# Altium PCB Clock_Board.PcbDoc
Units mm, origin at the board's own origin, x right, y up, seen from the top; angles counter-clockwise.
Board outline 370.84 x 228.47 mm, 4 copper layers (Top Layer, Internal Plane 1, Internal Plane 2, Bottom Layer); 58 components, 69 nets, 262 pads, 0 vias.
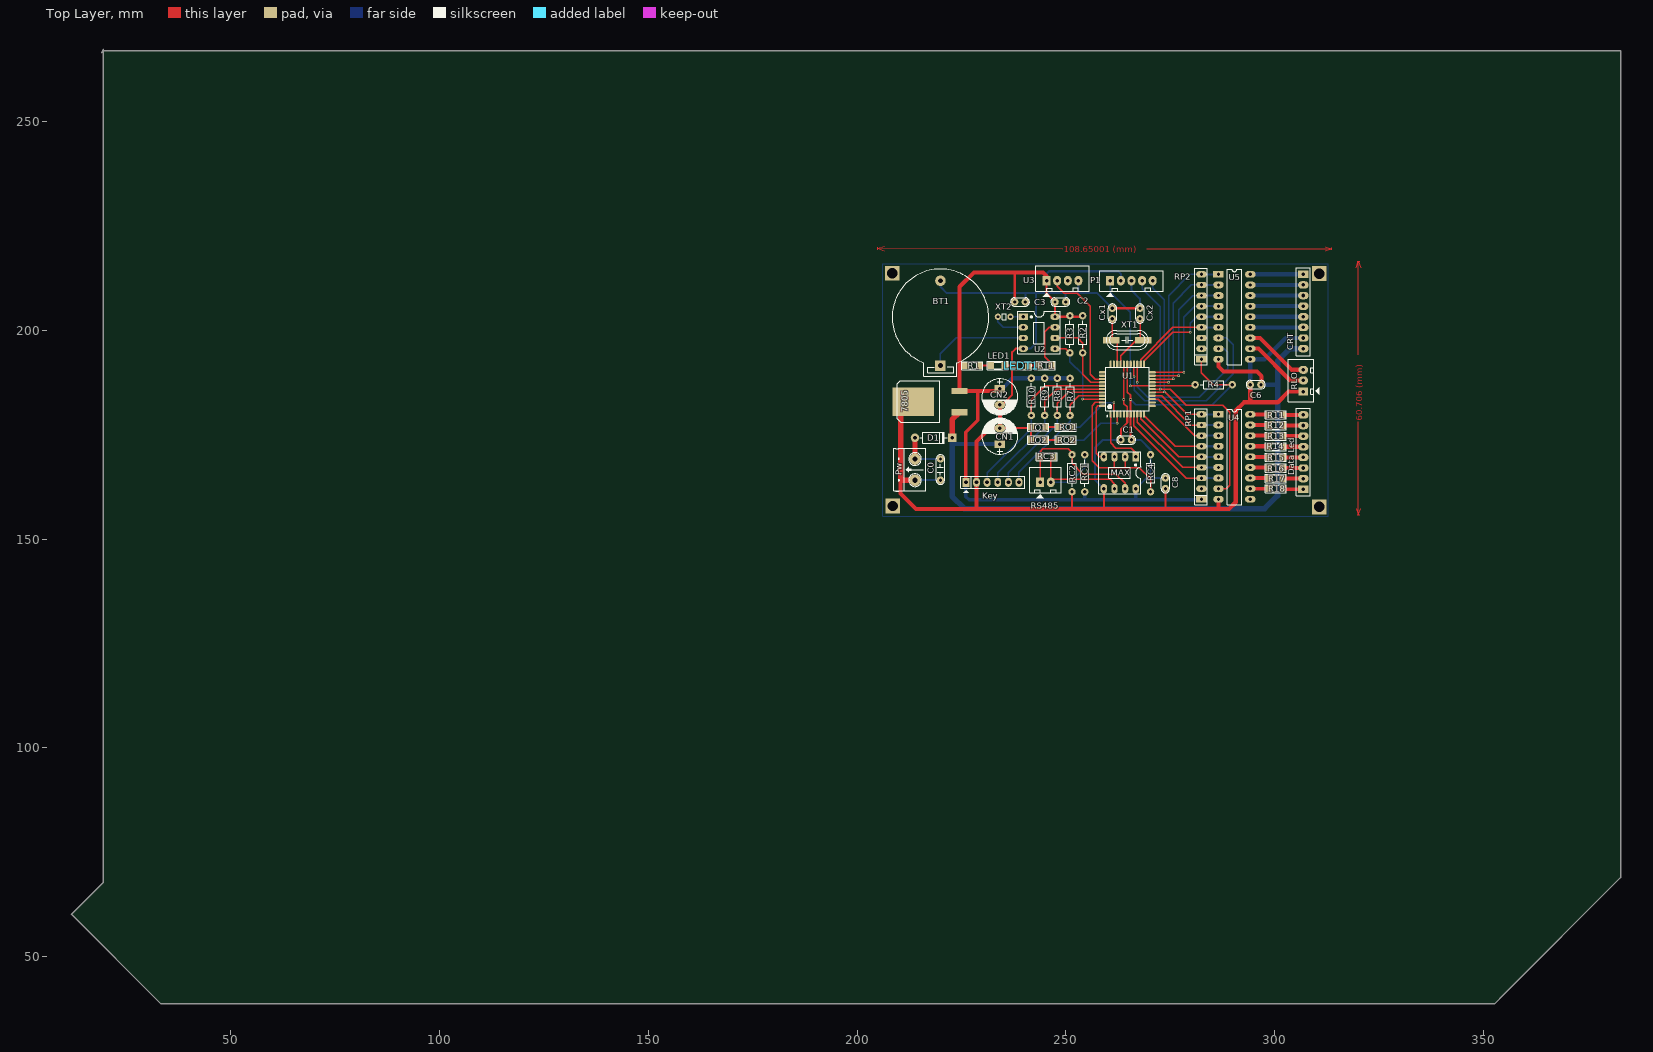
[diagram p0: Top Layer view]
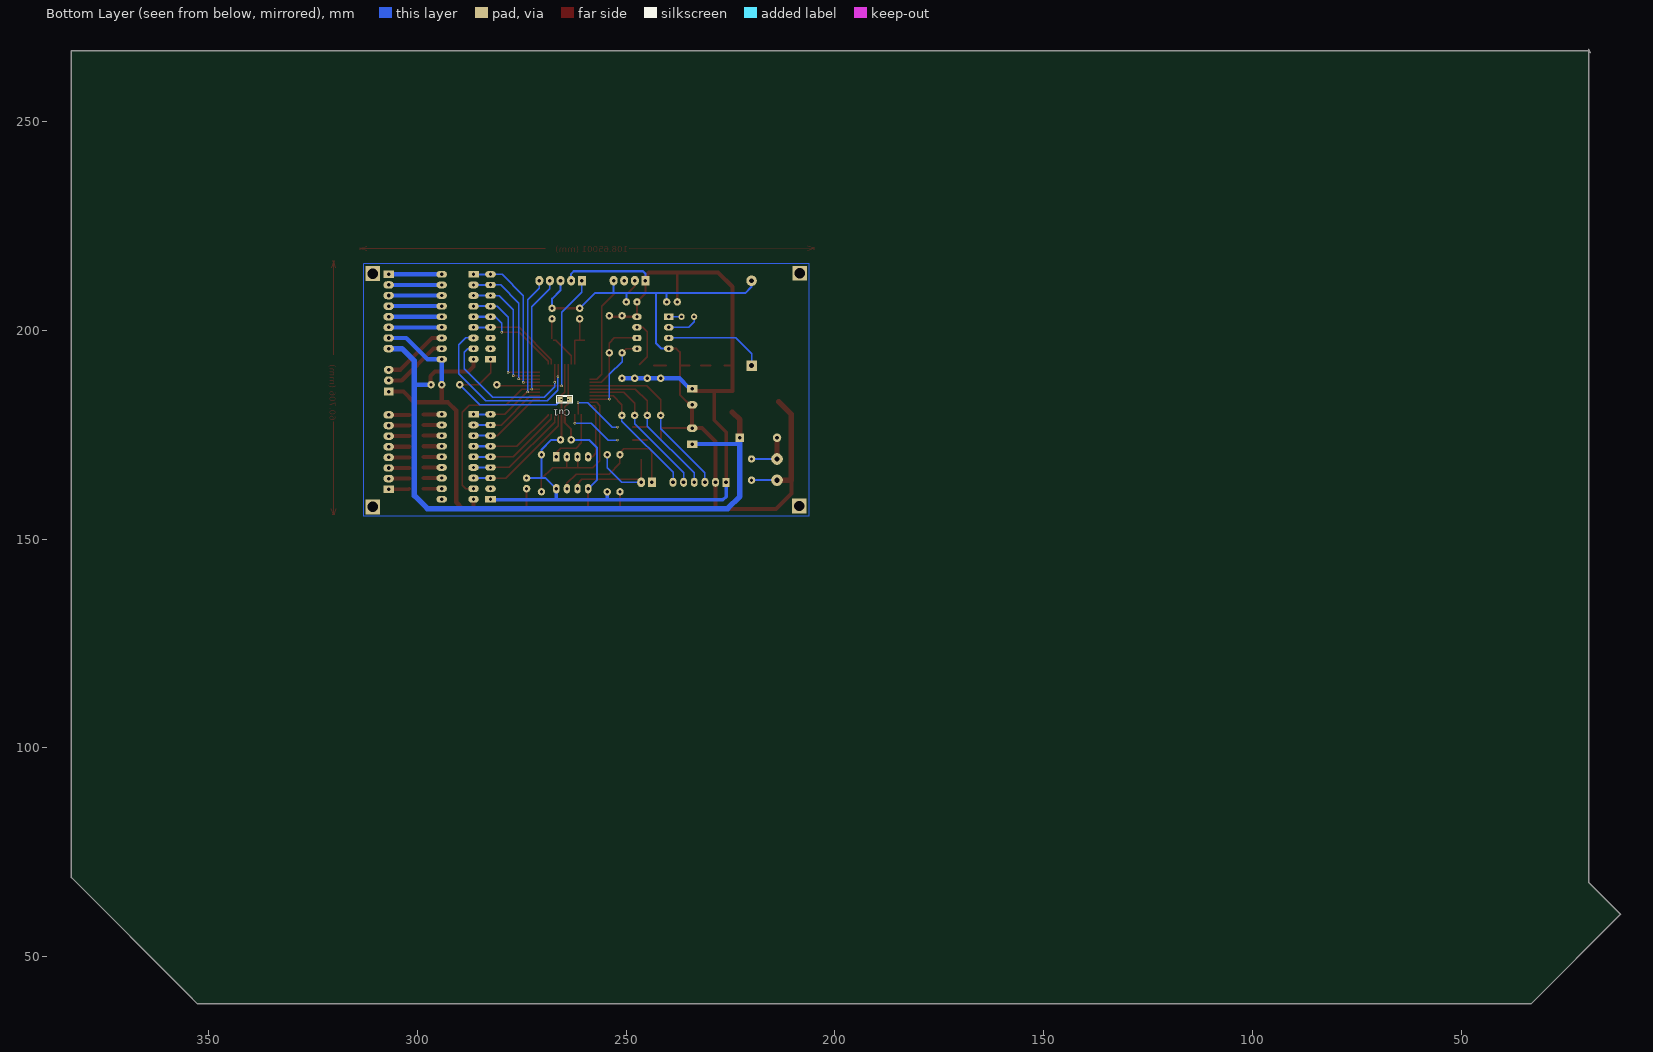
[diagram p1: Bottom Layer view, seen from below]
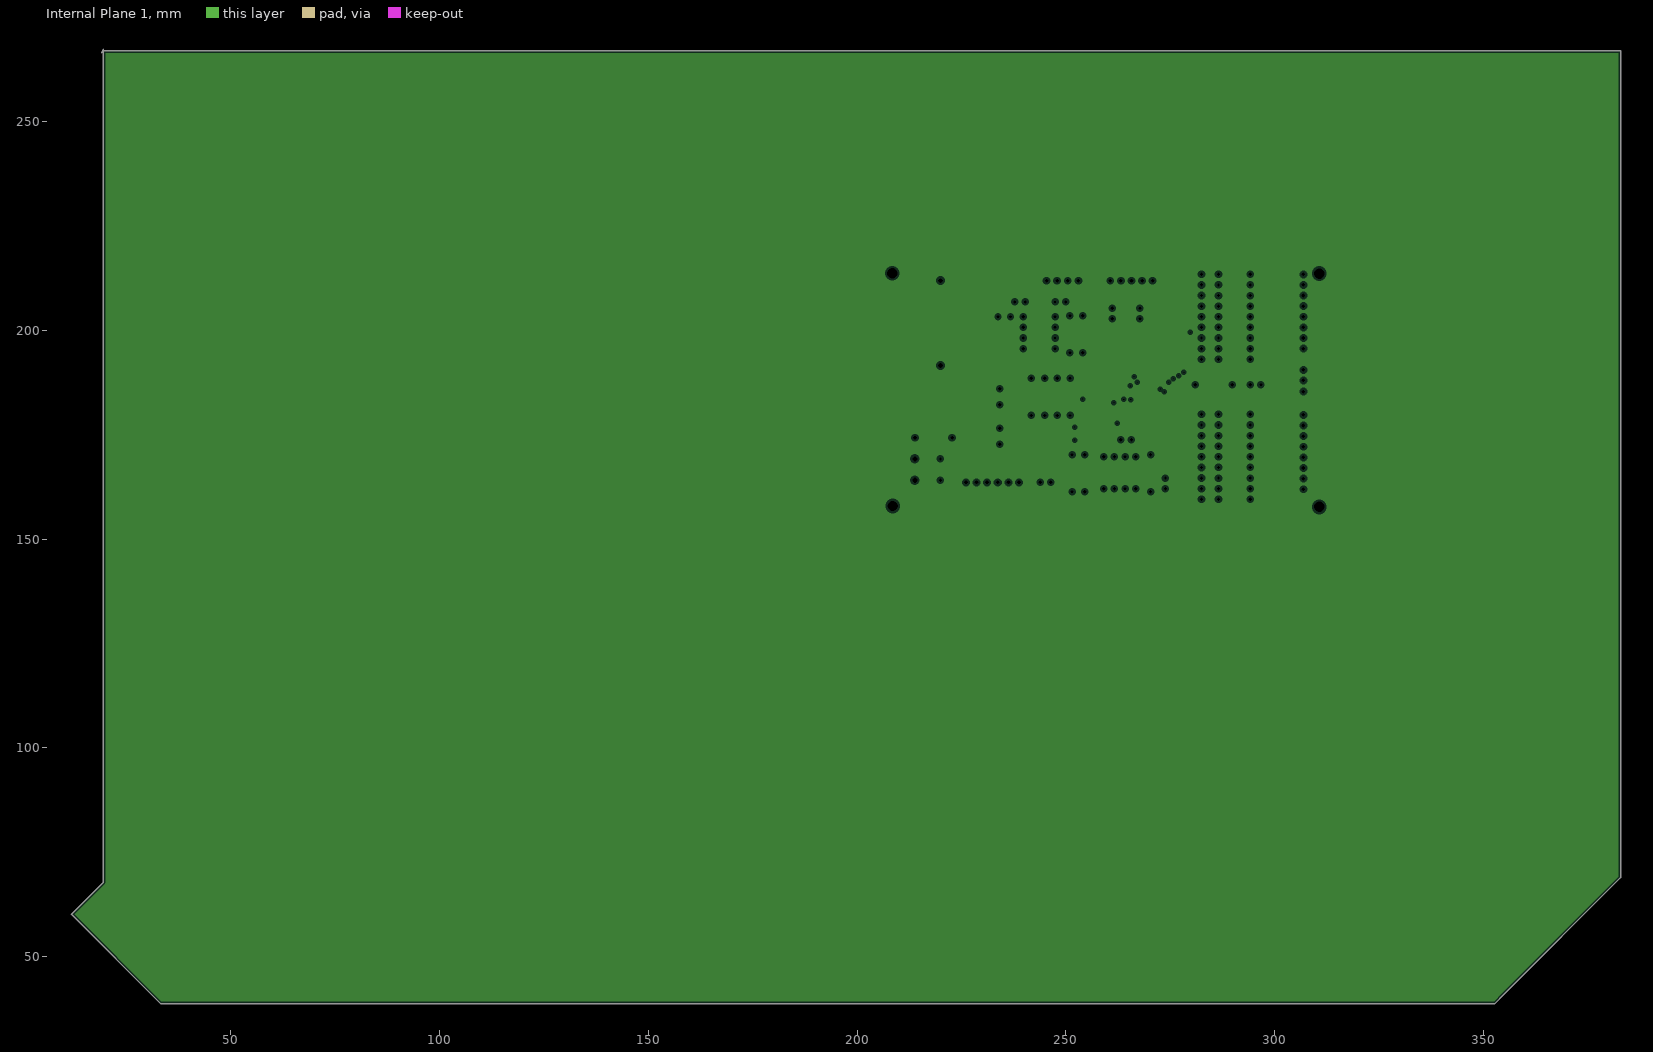
[diagram p2: Internal Plane 1, clearances drawn from the general rule]
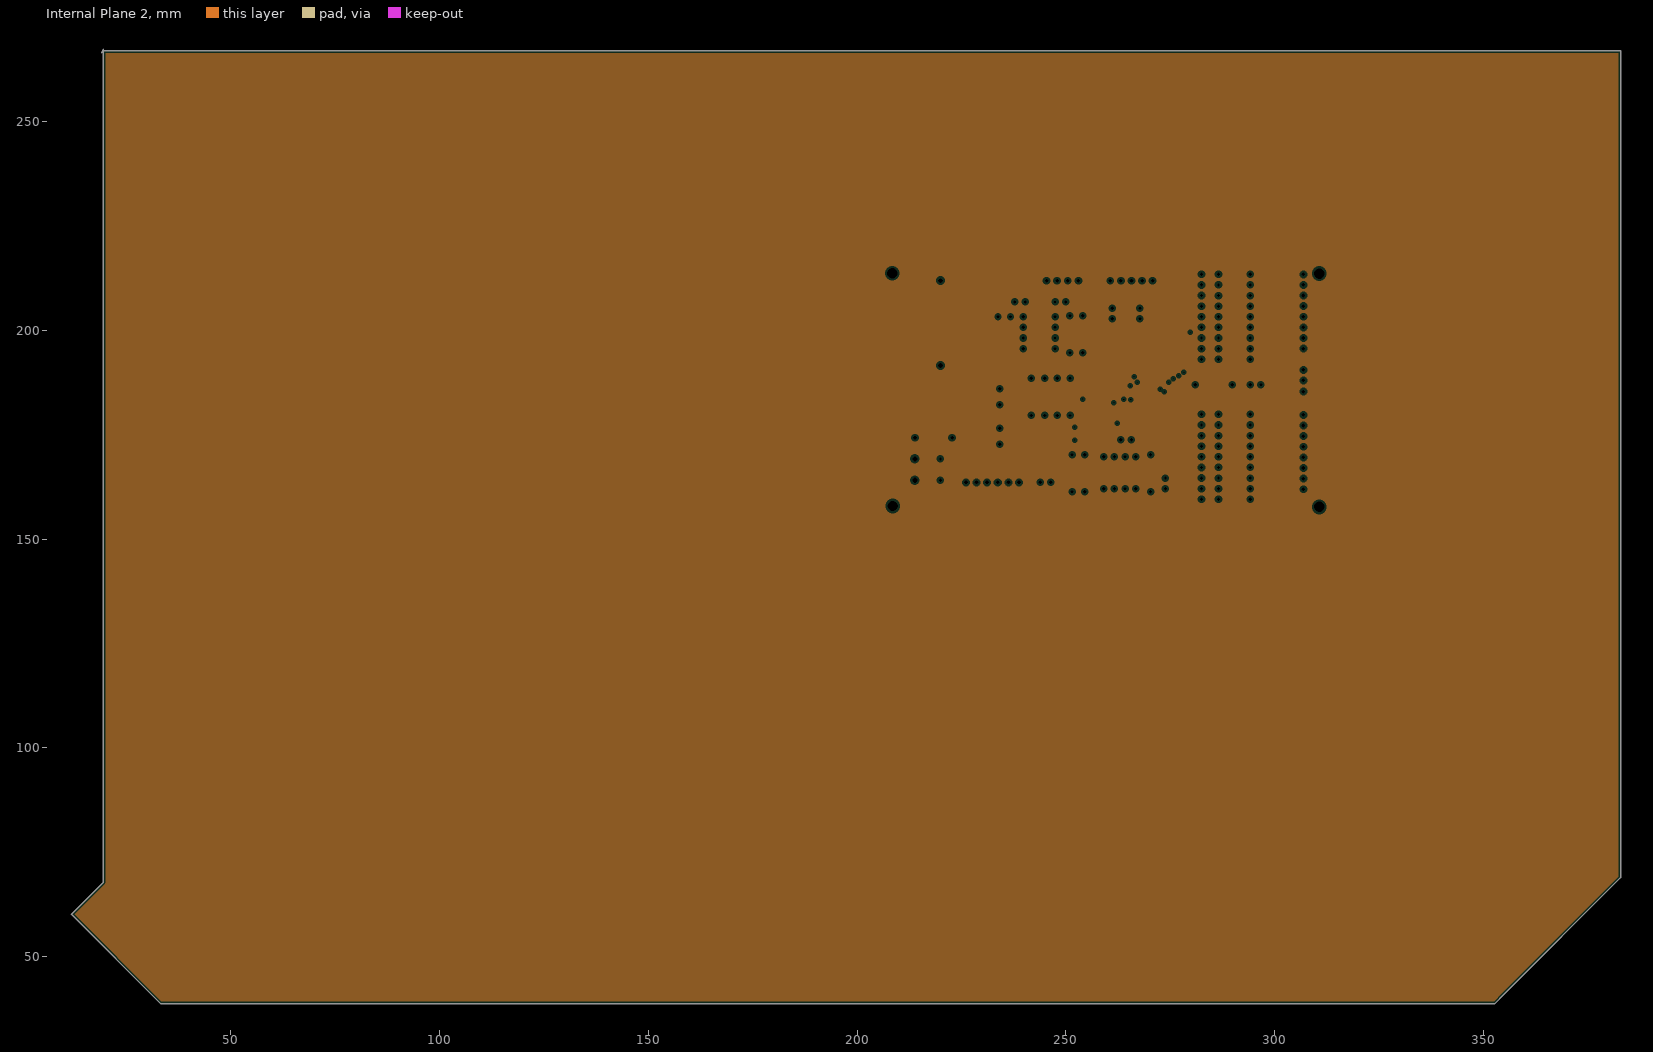
[diagram p3: Internal Plane 2, clearances drawn from the general rule]
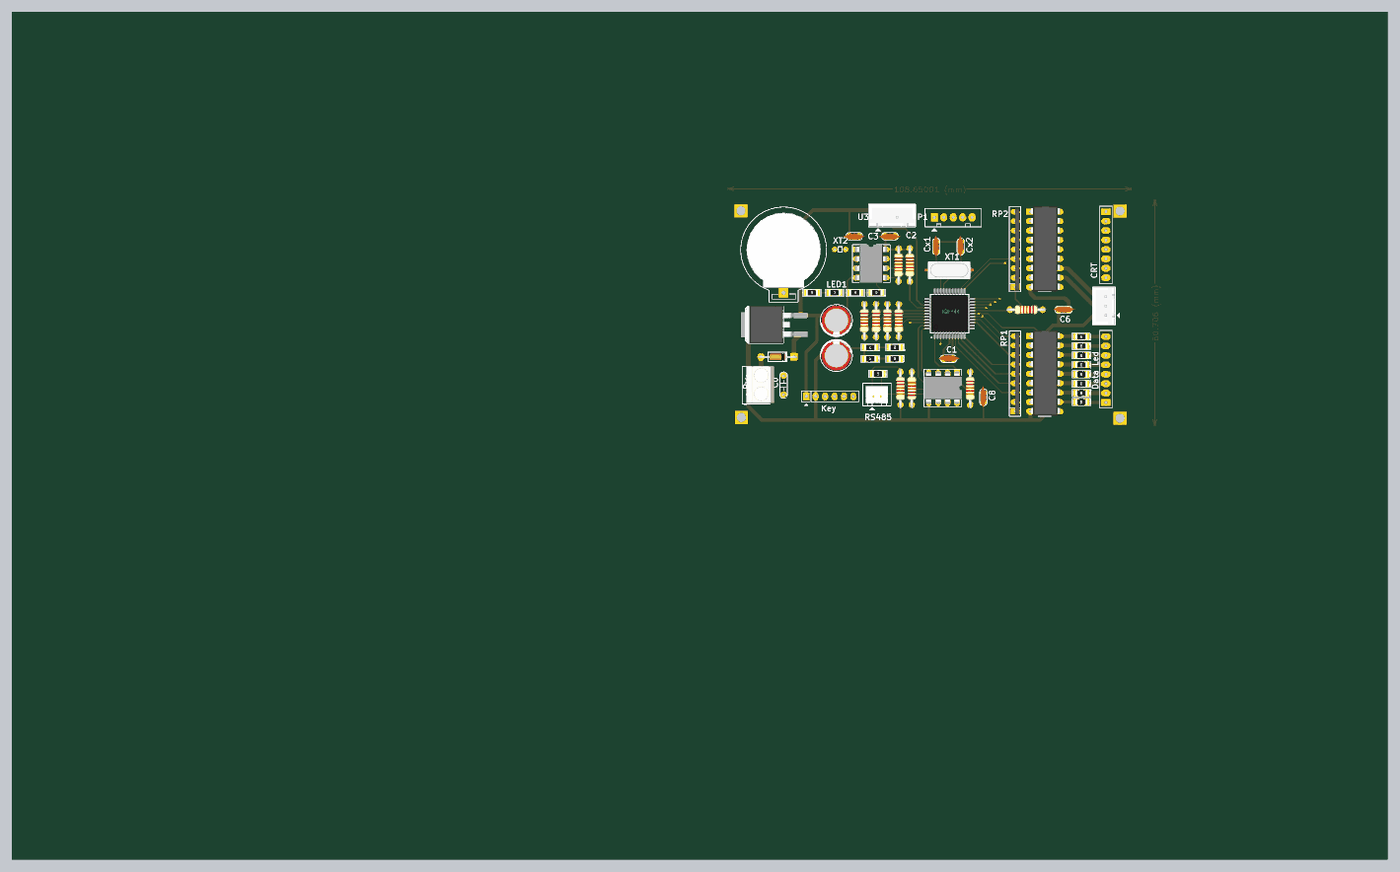
[diagram p4: 3D render of the assembled board from above, using the file's embedded part models]

## Layer stack, top to bottom
Top Layer: signal copper 0.0356
Dielectric: dielectric 0.32, FR-4, Dk 4.8
Internal Plane 1: plane copper 0.0356
Dielectric: dielectric 0.32, FR-4, Dk 4.8
Internal Plane 2: plane copper 0.0356
Dielectric: dielectric 0.32, FR-4, Dk 4.8
Bottom Layer: signal copper 0.0356

## Board outline
19.177,266.446 19.558,266.827 382.778,266.827 382.778,68.961 354.838,41.021 352.552,38.735 52.197,38.735 33.401,38.735 11.938,60.198 19.558,67.818 19.558,267.208

## Design rules (kind name [scope] priority, off if disabled: settings)
AssemblyTestPointUsage AssemblyTestPointUsage_1 [All] p2:
AssemblyTestpoint AssemblyTestpoint_1 [All] p2: testpointundercomponent=TRUE minsize=1.016 maxsize=2.54 preferedsize=1.524 minholesize=0 maxholesize=1.016 preferedholesize=0.813 testpointgrid=0.025 usegrid=TRUE gridtolerance=0 allowsidetop=TRUE allowsidebottom=TRUE
Clearance [All] p1: gap=0.2
ComponentClearance ComponentClearance_1 [All] p2: gap=0.254 collisioncheckmode=3 verticalgap=0.254 showdistances=FALSE
DiffPairsRouting DiffPairsRouting_1 [All] p2: maxlimit=0.254 minlimit=0.254 mostfreqgap=0.254 maxuncoupledlength=12.7
FabricationTestPointUsage TestPointUsage [All] p2: valid=0 allowmultiple=FALSE
FabricationTestpoint Testpoint [All] p2: side=3 testpointundercomponent=TRUE minsize=1.016 maxsize=2.54 preferedsize=1.524 minholesize=0 maxholesize=1.016 preferedholesize=0.813 testpointgrid=0.025 allowsidetop=TRUE allowsidebottom=TRUE usegrid=TRUE gridtolerance=0
FanoutControl Fanout_LCC [IsLCC] p1: bgadir=Out bgaviamode=Centered fanoutstyle=Auto fanoutdirection=Alternating viagrid=0.025 // Fanout_LCC (Default Rule)
FanoutControl Fanout_BGA [IsBGA] p2: bgadir=Out bgaviamode=Centered fanoutstyle=Auto fanoutdirection=Alternating viagrid=0.025 // Fanout_BGA (Default Rule)
FanoutControl Fanout_Small [(CompPinCount < 5)] p3: bgadir=Out bgaviamode=Centered fanoutstyle=Auto fanoutdirection=OutThenIn viagrid=0.025 // Fanout_Small (Default Rule)
FanoutControl Fanout_SOIC [IsSOIC] p4: bgadir=Out bgaviamode=Centered fanoutstyle=Auto fanoutdirection=Alternating viagrid=0.025 // Fanout_SOIC (Default Rule)
FanoutControl Fanout_BGA_1 [IsBGA] p6: bgadir=Out bgaviamode=Centered fanoutstyle=Auto fanoutdirection=Alternating viagrid=0.025 // Fanout_BGA (Default Rule)
FanoutControl Fanout_LCC_1 [IsLCC] p7: bgadir=Out bgaviamode=Centered fanoutstyle=Auto fanoutdirection=Alternating viagrid=0.025 // Fanout_LCC (Default Rule)
FanoutControl Fanout_SOIC_1 [IsSOIC] p8: bgadir=Out bgaviamode=Centered fanoutstyle=Auto fanoutdirection=Alternating viagrid=0.025 // Fanout_SOIC (Default Rule)
FanoutControl Fanout_Small_1 [(CompPinCount < 5)] p9: bgadir=Out bgaviamode=Centered fanoutstyle=Auto fanoutdirection=OutThenIn viagrid=0.025 // Fanout_Small (Default Rule)
FanoutControl Fanout_Default_1 [All] p10: bgadir=Out bgaviamode=Centered fanoutstyle=Auto fanoutdirection=Alternating viagrid=0.025 // Fanout_Default (Default Rule)
Height Height_1 [All] p2: minheight=0 maxheight=25.4 prefheight=12.7
HoleSize HoleSize_1 [All] p2: absolutevalues=TRUE maxlimit=2.54 minlimit=0.025 maxpercent=80.000 minpercent=20.000
HoleToHoleClearance HoleToHoleClearance_1 [All] p2: gap=0.254 allowstackedmicrovias=TRUE
LayerPairs LayerPairs_1 [All] p2: enforce=TRUE
MinimumSolderMaskSliver MinimumSolderMaskSliver_1 [All] p2: minsoldermaskwidth=0.254
NetAntennae NetAntennae_1 [All] p2: netantennaetolerance=0
PasteMaskExpansion PasteMaskExpansion_1 [All] p2: expansion=0
PlaneClearance [All] p1: clearance=0.508
PlaneClearance PlaneClearance_1 [All] p2: clearance=0.508
PlaneConnect [All] p1: planeconnectstyle=Relief reliefexpansion=0.508 reliefentries=4 reliefconductorwidth=0.254 reliefairgap=0.254
PolygonConnect [All] p1: connectstyle=Relief reliefconductorwidth=0.254 reliefentries=4 polygonreliefangle="90 Angle"
PolygonConnect PolygonConnect_1 [All] p2: connectstyle=Relief reliefconductorwidth=0.254 reliefentries=4 polygonreliefangle="90 Angle"
RoutingPriority RoutingPriority_1 [All] p2: routingpriority=0
RoutingTopology RoutingTopology_1 [All] p2: topology=Shortest
RoutingVias [All] p1: holewidth=0.6 width=1 viastyle="Through Hole" minholewidth=0.711 minwidth=1.27 maxholewidth=0.711 maxwidth=1.27
ShortCircuit ShortCircuit_1 [All] p2: allowed=FALSE
SilkToSilkClearance SilkToSilkClearance_1 [All] p2: silktosilkclearance=0.254
SilkscreenOverComponentPads [All] p1: minsilkscreentomaskgap=0.254
SilkscreenOverComponentPads SilkscreenOverComponentPads_1 [All] p2: minsilkscreentomaskgap=0.254
SolderMaskExpansion [All] p1: expansion=0.102
SolderMaskExpansion SolderMaskExpansion_1 [All] p2: expansion=0.102
UnRoutedNet UnRoutedNet_1 [All] p2:
Width [All] p1: maxlimit=1.3 minlimit=0.3 preferedwidth=1
21 further rules are at their usual default settings.

## Components (designator, comment, footprint, x,y, rotation, side; value= is the part's Value field where it differs from the comment)
7805 "Volt Reg" TO-263 224.536,180.34 r90 top
BT1 "PIN 3V" PIN3V 219.964,191.516 r90 top
C0 "104" CN2 219.964,164.084 r90 top
C1 "104" CN1 263.144,173.736 r0 top
C2 "104" CN1 249.936,206.756 r180 top
C3 "104" CN1 240.284,206.756 r180 top
C6 "104" CN1 294.132,186.944 r0 top
C8 "104" CN1 273.812,162.052 r90 top
CN1 "100uF/35V" CP1.5/3.4 234.188,172.72 r90 top
CN2 "100uF/35V" CP1.5/3.4 234.188,185.928 r270 top
CRT "HD8" HED8 306.832,213.36 r270 top
Cu1 "33pF" SM-0805 264.668,183.388 r0 bottom
Cx1 "22pF" CN1 261.112,202.692 r90 top
Cx2 "22pF" CN1 267.716,202.692 r90 top
D1 "Diode 1N4007" D1A 213.868,174.244 r180 top
"Data Led" "HD8" HED8 306.832,161.925 r90 top
Key "JP6 PIN" JP6 226.06,163.576 r0 top
LED1 "LED" SM-1206 233.68,191.516 r0 top
LEDT1 "LED" SM-1206 239.268,191.516 r180 top
LO1 "LED" SM-1206 243.332,176.784 r180 top
LO2 "LED" SM-1206 243.332,173.736 r180 top
MAX "MAX485CSA" DIP8/W0.3 266.7,169.672 r180 top (schematic designator MAX485)
P1 "JP5" CON5 260.604,211.836 r0 top
Pw "Jack 12v" HED2 213.868,164.084 r90 top
R1 "1k" SM-1206 227.584,191.516 r180 top
R2 "4.7k" R1/4W 254,194.564 r90 top
R3 "4.7k" R1/4W 250.952,194.564 r90 top
R4 "10K" R1/4W 280.924,186.944 r0 top
R7 "10k" R1/4W 250.996,179.586 r90 top
R8 "10k" R1/4W 247.948,179.586 r90 top
R9 "10k" R1/4W 244.9,179.586 r90 top
R10 "10k" R1/4W 241.727,179.586 r90 top
R11 "220R" SM-1206 300.228,179.705 r0 top
R12 "220R" SM-1206 300.228,177.165 r0 top
R13 "220R" SM-1206 300.228,174.625 r0 top
R14 "220R" SM-1206 300.228,172.085 r0 top
R15 "220R" SM-1206 300.228,169.545 r0 top
R16 "220R" SM-1206 300.228,167.005 r0 top
R17 "220R" SM-1206 300.228,164.465 r0 top
R18 "220R" SM-1206 300.228,162.052 r0 top
RC1 "560R" R1/4W 254.508,170.18 r270 top
RC2 "560R" R1/4W 251.46,161.305 r90 top
RC3 "120R" SM-1206 245.364,169.672 r180 top
RC4 "10K" R1/4W 270.256,161.305 r90 top
RLO "JP3" CON3 306.832,185.42 r90 top
RO1 "1k" SM-1206 249.936,176.784 r180 top
RO2 "1k" SM-1206 249.936,173.736 r180 top
RP1 "10K" RN8 282.448,159.512 r90 top
RP2 "10K" RN8 282.448,193.04 r90 top
RS485 "Header 2" CON2 243.84,163.576 r0 top
RT1 "470" SM-1206 244.983,191.516 r0 top
U1 "PIC887-TQFL" TQFP-44 264.668,185.928 r90 top
U2 "DS1307" DIP8/W0.3 239.776,203.2 r270 top
U3 "DHT11" CON4 245.364,211.836 r0 top
U4 "ULN2803" ULN2803 286.512,179.832 r0 top
U5 "TD62783" ULN2803 286.512,213.36 r0 top
XT1 "12MHz" Xtal_SMD 267.208,197.612 r0 top
XT2 "32.768kHz" tu_gom 235.712,203.2 r0 top

## Footprints (in the part's own frame and the unit in brackets; to place one, negate y for a bottom-side part, rotate by r counter-clockwise, add the part's x,y. Pads: shape width x height; smd on the part's side, far side on the other; paste and mask are expansions set on the pad)
CN1 [mil]
  round 70 hole 31: 1(0,0) 2(100,0)
  silkscreen extent -40,-40 141,40, body extent -60,-30 170,37, height 265
CN2 [mil]
  round 70 hole 31: 1(0,0) 2(200,0)
  silkscreen extent -40,-40 240,40
CON2 [mil] "CON2"
  rect 75x90 hole 34: 1(0,0)
  oval 75x90 hole 34: 2(100,0)
  silkscreen extent -100,-150 200,140, body extent -68,-70 168,107, height 236
CON3 [mil] "CON 3"
  rect 75x90 hole 34: 1(-5,0)
  oval 75x90 hole 34: 2(100,0) 3(200,0)
  silkscreen extent -100,-150 300,140, body extent -95,-90 295,136, height 276
CON4 [mil] "CON4"
  rect 75x90 hole 34: 1(0,0)
  oval 75x90 hole 34: 2(100,0) 3(200,0) 4(300,0)
  silkscreen extent -100,-150 400,140, body extent -90,-90 398,136, height 276
CON5 [mil] "CON5"
  rect 75x90 hole 34: 1(0,0)
  oval 75x90 hole 34: 2(100,0) 3(200,0) 4(300,0) 5(400,0)
  silkscreen extent -100,-150 500,96
CP1.5/3.4 [mil] "Tu hoa 220->470uF,16V, 470uF/16V,25V"
  rect 70x100 hole 32: 1(0,0)
  oval 70x100 hole 32: 2(150,0)
  silkscreen extent -95,-170 245,170, body extent -85,-157 230,157, height 446
D1A [mil] "Diode 1A, W 100mil, L 350mil"
  round 80 hole 35: 1(0,0)
  rect 80x80 hole 35: 2(-350,0)
  silkscreen extent -305,-50 -45,50, body extent -386,-33 34,36, height 84
DIP8/W0.3 [mil] "8 PIN, W 300mil, Pin to pin 100mil"
  rect 60x90 hole 31: 1(0,0)
  oval 60x90 hole 31: 2(100,0) 3(200,0) 4(300,0) 5(300,300) 6(200,300) 7(100,300) 8(0,300)
  silkscreen extent -50,-50 350,350, body extent -50,-40 350,336, height 201
HED2 [mil] "Header 2, 2 pin, hight 300mil, Pin to Pin 200, Colour Green"
  round 110 hole 50: 1(0,0) 2(200,0)
  silkscreen extent -106,-100 300,200, body extent -92,-140 302,155, height 394
HED8 [mil] "CON8"
  rect 70x100 hole 34: 1(0,0)
  oval 70x100 hole 34: 2(100,0) 3(200,0) 4(300,0) 5(400,0) 6(500,0) 7(600,0) 8(700,0)
  silkscreen extent -60,-65 765,65
JP6 [mil] "JP6"
  rect 65x85 hole 36: 1(0,0)
  oval 65x85 hole 36: 2(100,0) 3(200,0) 4(300,0) 5(400,0) 6(500,0)
  silkscreen extent -50,-99 556,58
PIN3V [mil] "Socket PIN 3V"
  rect 100x100 hole 45: 1(0,0)
  round 100 hole 45: 2(800,0)
  silkscreen extent -100,-455 910,455, body extent 53,-394 850,394, height 207
R1/4W [mil] "R 1/4W, 2 Pin, 350mil"
  round 70 hole 31: 1(0,0) 2(350,0)
  silkscreen extent 48,-38 302,38, body extent -40,-47 386,47, height 111
RN8 [mil] "R SIP8, 9 Pin"
  rect 60x100 hole 32: 1(0,0)
  oval 60x100 hole 32: 2(100,0) 3(200,0) 4(300,0) 5(400,0) 6(500,0) 7(600,0) 8(700,0) 9(800,0)
  silkscreen extent -50,-55 855,65, body extent -43,-44 843,5, height 259
SM-0805 [mil] "Compoment SMD 80x50mil"
  rect 50x55 smd: 1(-45,0) 2(45,0)
  silkscreen extent -77,-34 76,33, body extent -40,-25 40,25, height 24
SM-1206 [mil] "Compoment SMD 120x60mil"
  rect 60x65 smd: 1(-65,0) 2(65,0)
  silkscreen extent -99,-38 99,39, body extent -83,-35 83,36, height 25
TO-263 [mm] "SMD-DPAK"
  rect 1.5x3.8 smd: 1(0,0) 3(5.08,0)
  rect 6.8x9.9 smd: 2(2.5,11.1)
  silkscreen extent -2.4,4.7 7.5,14.9, body extent -2.5,-0.23 7.66,15.03
TQFP-44 [mm] "IC dan 44 chan"
  oval 1.65x0.55 smd: 1(-6.034,3.982) 2(-6.034,3.182) 3(-6.034,2.382) 4(-6.034,1.582) 5(-6.034,0.782) 6(-6.034,-0.018) 7(-6.034,-0.818) 8(-6.034,-1.618) 9(-6.034,-2.418) 10(-6.034,-3.218) 11(-6.034,-4.018) 23(5.966,-4.018) 24(5.966,-3.218) 25(5.966,-2.418) 26(5.966,-1.618) 27(5.966,-0.818) 28(5.966,-0.018) 29(5.966,0.782) 30(5.966,1.582) 31(5.966,2.382) 32(5.966,3.182) 33(5.966,3.982)
  oval 0.55x1.65 smd: 12(-4.034,-6.018) 13(-3.234,-6.018) 14(-2.434,-6.018) 15(-1.634,-6.018) 16(-0.834,-6.018) 17(-0.034,-6.018) 18(0.766,-6.018) 19(1.566,-6.018) 20(2.366,-6.018) 21(3.166,-6.018) 22(3.966,-6.018) 34(3.966,5.982) 35(3.166,5.982) 36(2.366,5.982) 37(1.566,5.982) 38(0.766,5.982) 39(-0.034,5.982) 40(-0.834,5.982) 41(-1.634,5.982) 42(-2.434,5.982) 43(-3.234,5.982) 44(-4.034,5.982)
  silkscreen extent -6.61,-5.22 5.17,5.18, body extent -6.03,-6.01 5.97,5.99, height 1.07
tu_gom [mm]
  round 1.5 hole 0.7: 1(-2,0) 2(1,0)
  silkscreen extent -1,-0.75 0,0.75
ULN2803 [mm]
  rect 2.5x1.6 hole 0.8: 1(0,0)
  oval 2.5x1.6 hole 0.8: 2(0,-2.54) 3(0,-5.08) 4(0,-7.62) 5(0,-10.16) 6(0,-12.7) 7(0,-15.24) 8(0,-17.78) 9(0,-20.32) 10(7.62,-20.32) 11(7.62,-17.78) 12(7.62,-15.24) 13(7.62,-12.7) 14(7.62,-10.16) 15(7.62,-7.62) 16(7.62,-5.08) 17(7.62,-2.54) 18(7.62,0)
  silkscreen extent 2.08,-21.59 5.54,1.27, body extent 0.06,-21.5 7.94,1.49, height 5.08
Xtal_SMD [mm] "Xtal Dan"
  rect 4x1.524 smd: 1(1.29,0.01) 2(-6.33,0.01)
  silkscreen extent -7.6,-2.28 2.56,2.3, body extent -9.2,-2.4 4,2.4, height 4.3

## Part data
7805: "Voltage Regulator"
BT1: "Battery 3VDC"
C0 C1 C2 C3 C6: library part CN2, "Cap np 104 => 105pF"
C8: library part CN1, "Cap np  1pF - 472pF"
CN1 CN2: library part CP3, "Cap 100uF/35V - 470uF/16V"
CRT "Data Led": library part Hed8, "Hedear 8"
Cu1 Cx1 Cx2: library part CN0, "Cremic For Xtal 1pF => 100pF"
D1: "1 Amp General Purpose Rectifier"
Key: library part JP6
LED1 LEDT1 LO1 LO2: "LED Single colour Green and Red"
MAX: "Low-Power, Slew-Rate-Limited RS-485/RS-422 Transceiver"
P1: library part Con5, "Connector 5"
Pw: library part Hed2, "Header 2 (Green)"
R1 R2 R3 R4 R7 R8 R9 R10 R11 R12 R13 R14 R15 R16 R17 R18 RC1 RC2 RC3 RC4 RO1 RO2 RT1: library part R1/4W, "Resistor 1/4W"
RLO: library part Con3, "Connector 3"
RP1 RP2: library part "Header 9", "Header, 9-Pin"
RS485: "Header, 2-Pin"
U1: library part PIC16F887-TQFL, "16F887_TQFP"
U2: "64 X 8 Serial Real-Time Clock"
U3: "Sensor Ther"
U4: library part "ULN 2803"
U5: library part TD62783AF
XT1 XT2: library part XTAL, "Crystal Oscillator"

## Free pads (board coordinates)
  round 0.6 hole 0.3: 0(274.6,187.5) 0(279.75,199.5) 1(265.45,186.65) 1(275.717,188.341) 2(267.075,187.525) 2(275.717,188.341) 3(266.3,188.825) 3(276.987,189.103) 4(253.975,183.5) 4(278.257,189.865) 5(265.525,183.375) 5(278.257,189.865) 6(263.825,183.4) 6(273.575,185.2) 7(272.55,185.9) 12(252.1,176.8) 13(252.1,173.7) 15(261.5,182.625) 16(262.25,177.725)
  rect 3.5x3.5 hole 2.5: 8(208.45,213.6) 9(208.575,157.9) 10(310.625,157.675) 11(310.625,213.55)

## Nets (pads, with @x,y where several pads share a name; then routed paths per layer and width w, separated by ;. In a path a pad name is that pad's centre, name@x,y a point inside that pad or via, vN(x,y) a via of type N, cw(c..) or ccw(c..) an arc to the next point about the centre after c; other vN are vias at no path point)
+12V: 7805.1 C6.2 CN1.1 CRT.8 D1.2 U5.9 | length 171.5
  Top Layer w1: U5.9 286.512,191.313 287.75,190.075 295.7,190.075 296.8,188.975 296.8,187.072 C6.2
  Top Layer w1.3: D1.2 222.758,178.562 7805.1
  Bottom Layer w1: 222.758,172.725 222.763,172.72 CN1.1 ; C6.2 300.469,186.944 300.675,187.15
  Bottom Layer w1.3: D1.2 222.758,172.725 222.758,160.217 225.7,157.275 297.55,157.275 300.675,160.4 300.675,187.15 300.675,192.625 303.63,195.58 CRT.8
A1: CRT.1 U5.18 | length 12.7
  Bottom Layer w1: U5.18 CRT.1
A2: CRT.2 U5.17 | length 12.7
  Bottom Layer w1: U5.17 CRT.2
A3: CRT.3 U5.16 | length 12.7
  Bottom Layer w1: U5.16 CRT.3
A4: CRT.4 U5.15 | length 12.7
  Bottom Layer w1: U5.15 CRT.4
A5: CRT.5 U5.14 | length 12.7
  Bottom Layer w1: U5.14 CRT.5
A6: CRT.6 U5.13 | length 12.7
  Bottom Layer w1: U5.13 CRT.6
ANODE1: pad.0@274.6,187.5 RP2.9 U1.19 U5.1 | length 38.7
  Top Layer w0.3: U1.19 pad.0@274.6,187.5
  Bottom Layer w0.3: pad.0@274.575,187.5 274.575,208.25 279.685,213.36 RP2.9
  Bottom Layer w0.5: RP2.9 U5.1
ANODE2: pad.1@275.717,188.341 pad.2@275.717,188.341 RP2.8 U1.20 U5.2 | length 35.7
  Top Layer w0.3: U1.20 pad.1@275.67,188.294
  Bottom Layer w0.3: pad.1@275.717,188.341 275.717,206.492 280.045,210.82 RP2.8
  Bottom Layer w0.5: RP2.8 U5.2
ANODE3: pad.3@276.987,189.103 RP2.7 U1.21 U5.3 | length 33
  Top Layer w0.3: U1.21 276.978,189.094 pad.3@276.987,189.103
  Bottom Layer w0.3: pad.3@276.987,189.103 276.987,204.887 280.38,208.28 RP2.7
  Bottom Layer w0.5: RP2.7 U5.3
ANODE4: pad.4@278.257,189.865 pad.5@278.257,189.865 RP2.6 U1.22 U5.4 | length 30.1
  Top Layer w0.3: U1.22 pad.4@278.228,189.894
  Bottom Layer w0.3: pad.4@278.257,189.865 278.257,203.132 280.865,205.74 RP2.6
  Bottom Layer w0.5: RP2.6 U5.4
ANODE5: pad.0@279.75,199.5 RP2.5 U1.23 U5.5 | length 24.1
  Top Layer w0.3: U1.23 268.686,192.536 275.6,199.45 pad.0@279.7,199.45
  Bottom Layer w0.3: pad.0@279.75,199.5 279.75,201.65 281.3,203.2 RP2.5
  Bottom Layer w0.5: RP2.5 U5.5
ANODE6: RP2.4 U1.24 U5.6 | length 22.9
  Top Layer w0.3: U1.24 267.886,192.936 275.61,200.66 RP2.4
  Bottom Layer w0.5: RP2.4 U5.6
APM: P1.4 pad.7 U1.17 U4.8 | length 69.1
  Top Layer w0.3: U1.17 pad.7@272.469,185.894 ; pad.7 275,185.9 278.825,182.075 287.575,182.075 289.25,180.4 289.25,162.925 288.377,162.052 U4.8
  Bottom Layer w0.3: P1.4 268.224,209.876 272.55,205.55 pad.7
APMO: "Data Led.1" R18.2 | length 5
  Top Layer w0.8: R18.2 302.006,161.925 306.832,161.925
DATA: U1.36 U3.2 | length 30.8
  Top Layer w0.3: U3.2 247.904,210.521 249.6,208.825 252.725,208.825 255.85,205.7 255.85,189.5 257.056,188.294 U1.36
DI: MAX.4 U1.44 | length 14.9
  Top Layer w0.3: U1.44 257.619,181.894 257.2,181.475 257.2,170.5 258.028,169.672 MAX.4
DOWN: Key.5 R8.1 U1.40 | length 35.6
  Top Layer w0.3: R8.1 247.948,182.448 250.594,185.094 U1.40
  Bottom Layer w0.3: Key.5 236.22,165.82 247.948,177.548 R8.1
EN: MAX.2 MAX.3 RC4.1 U1.43 | length 40
  Top Layer w0.3: U1.43 257.044,182.694 256.275,181.925 256.275,168.75 257.925,167.1 267.6,167.1 270.256,164.444 RC4.1 ; 261.62,167.1 MAX.3 ; 264.16,167.1 MAX.2
GND: 7805.2 BT1.2 C0.1 C1.1 C2.1 C3.1 C6.1 C8.1 CN1.2 CN2.2 CRT.7 Cu1.1 Cx1.2 Cx2.2 Key.2 LED1.2 LEDT1.2 LO1.2 LO2.2 MAX.5 P1.3 pad.6@263.825,183.4 Pw.1 RC2.1 RLO.1 U1.6 U1.29 U2.4 U3.4 U4.9 U5.10 | length 373.5
  Top Layer w0.3: U1.29 263.886,182.414 264.686,181.614 U1.6
  Top Layer w0.5: CN1.2 241.427,176.53 LO1.2 LO2.2 ; CN2.2@234.188,181.61 237.109,184.531 LEDT1.2@237.109,191.516 ; LED1.2@234.823,191.516 LEDT1.2@237.109,191.516 ; U2.4 237.98,195.58 237.109,194.709 LEDT1.2@237.109,191.516 ; 251.3,157.2 251.46,157.36 RC2.1 ; MAX.5 259.08,157.22 259.1,157.2 ; Cx1.2 Cx2.2 ; C1.1 263.144,176.319 264.686,177.861 U1.6 ; 273.725,157.2 273.812,157.287 C8.1
  Top Layer w1: 210.425,164.075 210.425,160.9 214.125,157.2 228.55,157.2 ; CN2.2@234.188,181.61 CN1.2 234.118,176.6 231.85,176.6 228.6,173.35 Key.2 228.6,157.25 228.55,157.2 ; 286.512,157.45 U4.9 ; C6.1 294.132,182.807 294.05,182.725 ; RLO.1 303.268,185.293 300.7,182.725 294.05,182.725 ; 228.55,157.2 251.3,157.2 259.1,157.2 273.725,157.2 289.05,157.2 290.65,158.8 290.65,180.775 292.6,182.725 294.05,182.725
  Top Layer w1.3: 210.425,164.075 210.434,164.084 Pw.1 ; 210.425,164.084 210.425,179.829 7805.2
  Bottom Layer w0.5: Pw.1 C0.1 ; BT1.2@220.025,212.405 220.025,210.325 221.475,208.875 257.469,208.875 Cx1.2 ; U2.4 241.53,195.58 242.825,196.875 242.825,208.875 ; C3.1 240.284,208.816 ; C2.1 249.936,208.736 ; 252.984,208.909 U3.4 ; MAX.5 256.925,164.207 256.925,171.8 258.861,173.736 C1.1 ; P1.3 265.684,209.566 267.716,207.534 Cx2.2
  Bottom Layer w1: C6.1 U5.10 297.54,193.04 302.62,198.12 CRT.7
ICSPCLK: P1.5 pad.6@273.575,185.2 RP1.9 U1.16 U4.1 | length 45.8
  Top Layer w0.3: U1.16 273.756,185.094 279.018,179.832 RP1.9
  Bottom Layer w0.3: P1.5 270.764,210.061 273.575,207.25 pad.6@273.575,185.2
  Bottom Layer w0.5: RP1.9 U4.1
LED_A: RP1.3 U1.8 U4.7 | length 28.2
  Top Layer w0.3: U1.8 266.286,177.064 278.758,164.592 RP1.3
  Bottom Layer w0.5: RP1.3 U4.7
LED_B: RP1.4 U1.9 U4.6 | length 25.8
  Top Layer w0.3: U1.9 267.086,177.964 277.918,167.132 RP1.4
  Bottom Layer w0.5: RP1.4 U4.6
LED_C: RP1.5 U1.10 U4.5 | length 23.5
  Top Layer w0.3: U1.10 267.886,178.839 277.053,169.672 RP1.5
  Bottom Layer w0.5: RP1.5 U4.5
LED_D: RP1.6 U1.11 U4.4 | length 21.2
  Top Layer w0.3: U1.11 268.686,179.639 276.113,172.212 RP1.6
  Bottom Layer w0.5: RP1.6 U4.4
LED_E: RP1.7 U1.14 U4.3 | length 19.5
  Top Layer w0.3: U1.14 272.081,183.494 280.823,174.752 RP1.7 RP1.7@282.4,174.752
  Bottom Layer w0.5: RP1.7 U4.3
LED_F: RP1.8 U1.15 U4.2 | length 18.7
  Top Layer w0.3: U1.15 272.881,184.294 279.883,177.292 RP1.8
  Bottom Layer w0.5: RP1.8 U4.2
LO1: pad.12 pad.15 RO1.1 U1.2 | length 14.5
  Top Layer w0.3: U1.2 261.486,182.611 pad.15
  Bottom Layer w0.3: pad.12 253.325,176.8 259.15,182.625 pad.15
LO2: pad.13 pad.16 RO2.1 U1.3 | length 14
  Top Layer w0.3: pad.16@262.275,177.725 262.286,177.736 U1.3
  Bottom Layer w0.3: pad.13 254.3,173.7 258.325,177.725 pad.16
MCLR: P1.1 pad.1@265.45,186.65 R4.1 U1.18 | length 42.4
  Top Layer w0.3: pad.1@265.45,186.694 U1.18 R4.1@280.674,186.694
  Bottom Layer w0.3: P1.1 260.604,209.096 265.45,204.25 pad.1@265.45,186.65
NetBT1_1: BT1.1 U2.3 | length 24.2
  Bottom Layer w0.3: BT1.1@219.975,191.516 219.975,194.375 223.72,198.12 U2.3
NetC0_2: C0.2 D1.1 Pw.2 | length 11.2
  Top Layer w1.3: Pw.2 D1.1
  Bottom Layer w0.5: Pw.2 C0.2
NetCx1_1: Cx1.1 U1.31 XT1.2 | length 13.1
  Top Layer w0.3: XT1.2@259.862,197.622 XT1.2 262.286,197.622 U1.31 ; XT1.2@261.112,197.71 Cx1.1
NetCx2_1: Cx2.1 U1.30 XT1.1 | length 12.7
  Top Layer w0.3: U1.30 263.086,193.836 266.872,197.622 XT1.1@267.482,197.622 ; XT1.1@267.733,197.971 Cx2.1@267.733,202.767
NetLED1_1: LED1.1 R1.1 | length 2.3
  Top Layer w0.5: R1.1@229.743,191.516 LED1.1@232.025,191.516
NetLEDT1_1: LEDT1.1 RT1.1 | length 2.9
  Top Layer w0.5: LEDT1.1@240.475,191.516 RT1.1
NetLO1_1: LO1.1 RO1.2 | length 3.3
  Top Layer w0.5: LO1.1 RO1.2
NetLO2_1: LO2.1 RO2.2 | length 3.3
  Top Layer w0.5: LO2.1 RO2.2
NetMAX_6: MAX.6 RC1.1 RC3.1 RS485.2 | length 35.5
  Top Layer w0.3: RC3.1@246.38,169.037 246.38,164.48 246.15,164.25 260.575,164.25 261.62,163.205 MAX.6
  Bottom Layer w0.3: RS485.2@246.125,163.325 RS485.2@246.125,164.225 ; RS485.2 251.026,163.576 254.508,167.058 RC1.1
NetMAX_7: MAX.7 RC2.2 RC3.2 RS485.1 | length 33.8
  Top Layer w0.3: RS485.1 243.84,170.89 244.5,171.55 250.55,171.55 251.46,170.64 RC2.2@251.46,170.434 ; RC2.2 251.46,168.14 254.05,165.55 261.975,165.55 264.16,163.365 MAX.7
NetR11_1: R11.1 U4.18 | length 4.3
  Top Layer w1: U4.18 R11.1@298.45,179.832
NetR12_1: R12.1 U4.17 | length 4.3
  Top Layer w1: U4.17 R12.1@298.45,177.292
NetR13_1: R13.1 U4.16 | length 4.3
  Top Layer w1: U4.16 R13.1@298.45,174.752
NetR14_1: R14.1 U4.15 | length 4.3
  Top Layer w1: U4.15 R14.1@298.45,172.212
NetR15_1: R15.1 U4.14 | length 4.3
  Top Layer w1: U4.14 R15.1@298.45,169.672
NetR16_1: R16.1 U4.13 | length 4.3
  Top Layer w1: U4.13 R16.1@298.45,167.132
NetR17_1: R17.1 U4.12 | length 4.3
  Top Layer w1: U4.12 R17.1@298.45,164.592
NetR18_1: R18.1 U4.11 | length 4.4
  Top Layer w0.8: U4.11 R18.1
NetRLO_2: RLO.2 U5.11 | length 15.9
  Top Layer w1: U5.11 296.07,195.58 303.69,187.96 RLO.2
NetRLO_3: RLO.3 U5.12 | length 15.9
  Top Layer w1: U5.12 296.455,198.12 304.075,190.5 RLO.3
NetRT1_2: RT1.2 U2.7 | length 11.5
  Top Layer w0.3: RT1.2@246.85,191.75 244.983,193.617 244.983,199.658 245.985,200.66 U2.7
NetU2_1: U2.1 XT2.2 | length 3.1
  Bottom Layer w0.3: XT2.2 U2.1
NetU2_2: U2.2 XT2.1 | length 7.8
  Bottom Layer w0.3: XT2.1 233.712,201.963 235.015,200.66 U2.2
OUT_A: "Data Led.2" R17.2 | length 5
  Top Layer w1: R17.2 306.832,164.465
OUT_B: "Data Led.3" R16.2 | length 5
  Top Layer w1: R16.2 306.832,167.005
OUT_C: "Data Led.4" R15.2 | length 5
  Top Layer w1: R15.2 306.832,169.545
OUT_D: "Data Led.5" R14.2 | length 5
  Top Layer w1: R14.2 306.832,172.085
OUT_E: "Data Led.6" R13.2 | length 5
  Top Layer w1: R13.2 306.832,174.625
OUT_F: "Data Led.7" R12.2 | length 5
  Top Layer w1: R12.2 306.832,177.165
OUT_G: "Data Led.8" R11.2 | length 5
  Top Layer w1: R11.2 306.832,179.705
RL1: pad.2@267.075,187.525 U1.25 U5.8 | length 37.5
  Top Layer w0.3: pad.2@267.086,187.55 U1.25
  Bottom Layer w0.3: pad.2@267.075,187.525 267.075,186.475 269.6,183.95 281.9,183.95 288.75,190.8 288.75,194.75 287.92,195.58 U5.8
RL2: pad.3@266.3,188.825 U1.26 U5.7 | length 44.9
  Top Layer w0.3: pad.3@266.286,188.825 U1.26
  Bottom Layer w0.3: pad.3@266.3,188.825 266.3,185.625 268.85,183.075 283.575,183.075 290.025,189.525 290.025,196.5 288.405,198.12 U5.7
RO: MAX.1 U1.1 | length 14.9
  Top Layer w0.3: U1.1 260.686,172.989 261.9,171.775 265.6,171.775 266.7,170.675 MAX.1
SCL: R2.1 U1.37 U2.6 | length 20.1
  Top Layer w0.3: U2.6 252.78,198.12 254,196.9 R2.1 254,189.425 255.931,187.494 U1.37
SDA: pad.4@253.975,183.5 R3.1 U1.42 U2.5 | length 21
  Top Layer w0.3: U2.5 249.936,195.58 R3.1 ; pad.4@253.975,183.5 253.981,183.494 U1.42
  Bottom Layer w0.3: R3.1 250.952,192.473 253.975,189.45 pad.4@253.975,183.5
SET: Key.6 R7.1 U1.41 | length 32.2
  Top Layer w0.3: R7.1 250.996,182.171 253.119,184.294 U1.41
  Bottom Layer w0.3: Key.6 238.76,165.96 250.996,178.196 R7.1
TIMER: Key.3 R10.1 U1.38 | length 42.5
  Top Layer w0.3: R10.1 241.727,183.377 245.044,186.694 U1.38
  Bottom Layer w0.3: Key.3 231.14,165.865 241.727,176.452 R10.1
UP: Key.4 R9.1 U1.39 | length 39.1
  Top Layer w0.3: R9.1 244.9,183.05 247.744,185.894 U1.39
  Bottom Layer w0.3: Key.4 233.68,165.805 244.9,177.025 R9.1
VCC: 7805.3 C1.2 C2.2 C3.2 C8.2 CN2.1 Cu1.2 Key.1 MAX.8 P1.2 pad.5@265.525,183.375 R1.2 R2.2 R3.2 R4.2 R7.2 R8.2 R9.2 R10.2 RC1.2 RC4.2 RP1.1 RP2.1 U1.7 U1.28 U2.8 U3.1 | length 315.8
  Top Layer w0.3: U1.28 264.686,185.189 265.486,184.389 ; RP2.1 282.448,189.802 285.306,186.944 R4.2
  Top Layer w0.5: 224.536,191.65 224.67,191.516 R1.2@226.441,191.516 ; C3.2 237.744,213.6 ; U3.1@245.364,212.961 245.364,208.788 C2.2 U2.8 R2.2@253.746,203.2 ; C1.2@265.486,173.934 U1.7 265.486,184.389
  Top Layer w0.8: Key.1 226.06,175.585 228.875,178.4 228.875,185.42
  Top Layer w1: CN2.1 233.68,185.42 228.875,185.42 7805.3 224.536,191.65 224.536,210.386 227.975,213.825 244.5,213.825 U3.1@245.364,212.961
  Bottom Layer w0.3: pad.5@265.525,183.375 266.7,182.2 285.07,182.2 R4.2
  Bottom Layer w0.5: U3.1 245.364,213.514 245.939,214.089 262.536,214.089 263.144,213.481 P1.2 ; C1.2 267.914,173.736 270.256,171.394 RC4.2 270.256,164.761 270.425,164.592 ; MAX.8 269.24,164.592 270.425,164.592 ; C8.2 270.425,164.592
  Bottom Layer w0.8: Key.1 226.06,160.14 226.825,159.375 ; RC1.2 254.508,159.483 254.4,159.375 226.825,159.375 ; MAX.8 266.7,159.5 266.825,159.375 ; RP1.1 282.311,159.375 266.825,159.375 ; 226.825,159.375 266.825,159.375
  Bottom Layer w1: CN2.1@233.875,186.125 234.893,186.125 237.244,188.476 R10.2 R9.2 R8.2 R7.2
pads on no net: RP1.2 RP2.2 RP2.3 U1.4 U1.5 U1.12 U1.13 U1.27 U1.32 U1.33 U1.34 U1.35 U3.3 U4.10
copper on no net: | length 482.2
  Top Layer w0.254: 205,219.296 205,219.804 ; 206.524,219.041 205,219.55 ; 206.524,220.057 205,219.55 ; 249.27,219.53 205,219.55 ; 269.38,219.52 313.65,219.5 ; 312.126,218.993 313.65,219.5 ; 312.126,220.009 313.65,219.5 ; 313.65,219.246 313.65,219.754 ; 319.517,157.295 320.025,155.771 ; 319.517,214.953 320.025,216.477 ; 319.771,155.771 320.279,155.771 ; 319.771,216.477 320.279,216.477 ; 320.025,178.1 320.025,155.771 ; 320.025,194.148 320.025,216.477 ; 320.533,157.295 320.025,155.771 ; 320.533,214.953 320.025,216.477
  Bottom Layer w0.254: 206.15,155.5 312.825,155.5 312.825,215.875 206.15,215.875 206.15,155.5

## Polygon pours and split planes (outlines as drawn)
no net on Internal Plane 1 (split plane): 382.268,69.172 354.477,41.382 352.341,39.245 33.612,39.245 12.66,60.198 19.919,67.457 19.982,67.534 20.03,67.623 20.059,67.718 20.068,67.818 20.068,266.317 382.268,266.317
no net on Internal Plane 2 (split plane): 382.268,69.172 354.477,41.382 352.341,39.245 33.612,39.245 12.66,60.198 19.919,67.457 19.982,67.534 20.03,67.623 20.059,67.718 20.068,67.818 20.068,266.317 382.268,266.317

## Other copper
Top Layer:
  text "108.65001 (mm)" at 249.523,218.615 h1.52 r359.97
  text "60.706 (mm)" at 320.939,178.354 h1.52 r90

## Silkscreen, mask and mechanical layers (free items; w line width, h text height)
Mechanical 16:
  drawing of 1882 lines, arcs and shapes, not listed
  text "1" at 24.037,278.511 h1.78
  text "2" at 73.076,278.511 h1.78
  text "3" at 122.335,278.511 h1.78
  text "4" at 171.628,278.511 h1.78
  text "5" at 220.904,278.511 h1.78
  text "6" at 269.926,278.511 h1.78
  text "7" at 319.456,278.511 h1.78
  text "8" at 368.478,278.511 h1.78
  text "A" at 1.905,244.526 h1.78
  text "A" at 390.525,244.526 h1.78
  text "B" at 1.905,173.914 h1.78
  text "B" at 390.525,173.914 h1.78
  text "C" at 1.905,103.302 h1.78
  text "C" at 329.057,76.759 h1.78
  text "D" at 1.905,33.198 h1.78
  text "D" at 390.525,33.198 h1.78
  text "ENGINEER:" at 275.59,33.02 h1.14
  text "TITLE:" at 313.69,33.02 h1.14
  text "PCB DESIGNER:" at 275.59,25.527 h1.14
  text "DATE:" at 275.59,17.78 h1.14
  text "PART NO.:" at 313.69,17.78 h1.14
  text "REV:" at 367.03,17.78 h1.14
  text "Altium Limited" at 242.57,15.24 h1.78
  text ".PRINT_DATE" at 276.86,14.732 h1.78
  text "12a Rodborough Rd" at 242.57,12.7 h1.78
  text "Frenchs Forest" at 242.57,10.16 h1.78
  text "FILE NAME:" at 275.59,10.16 h1.14
  text "DWG NO:" at 313.69,10.16 h1.14
  text "SCALE:" at 367.03,10.16 h1.14
  text "NSW 2086" at 242.57,7.62 h1.78
  text ".PCB_FILE_NAME_NO_PATH" at 276.86,7.112 h1.78
  text "1" at 24.037,1.651 h1.78
  text "2" at 73.076,1.651 h1.78
  text "3" at 122.335,1.651 h1.78
  text "4" at 171.628,1.651 h1.78
  text "5" at 220.904,1.651 h1.78
  text "6" at 269.926,1.651 h1.78
  text "7" at 319.456,1.651 h1.78
  text "8" at 368.478,1.651 h1.78